# Altium PCB Ferrofluid_Display.PcbDoc
Units mil, origin at the board's own origin, x right, y up, seen from the top; angles counter-clockwise.
Board outline 4881.89 x 6043.31 mil, 2 copper layers (Top Layer, Bottom Layer); 109 components, 112 nets, 498 pads, 26 vias.
Unrouted connection lines stored in the file: 258.
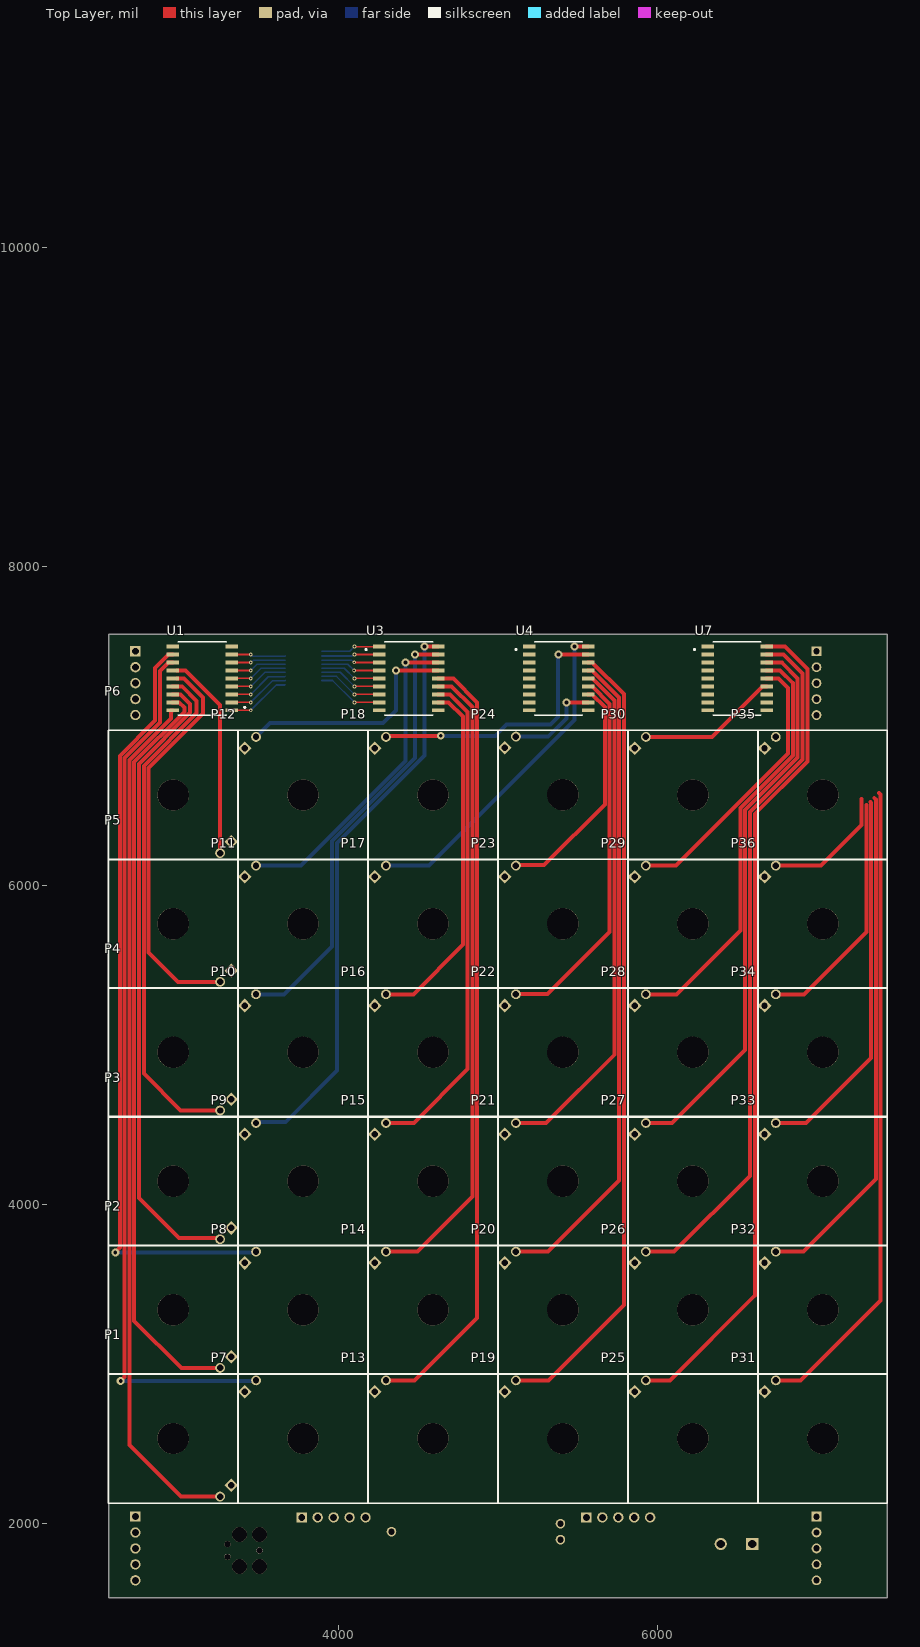
[diagram p0: Top Layer view]
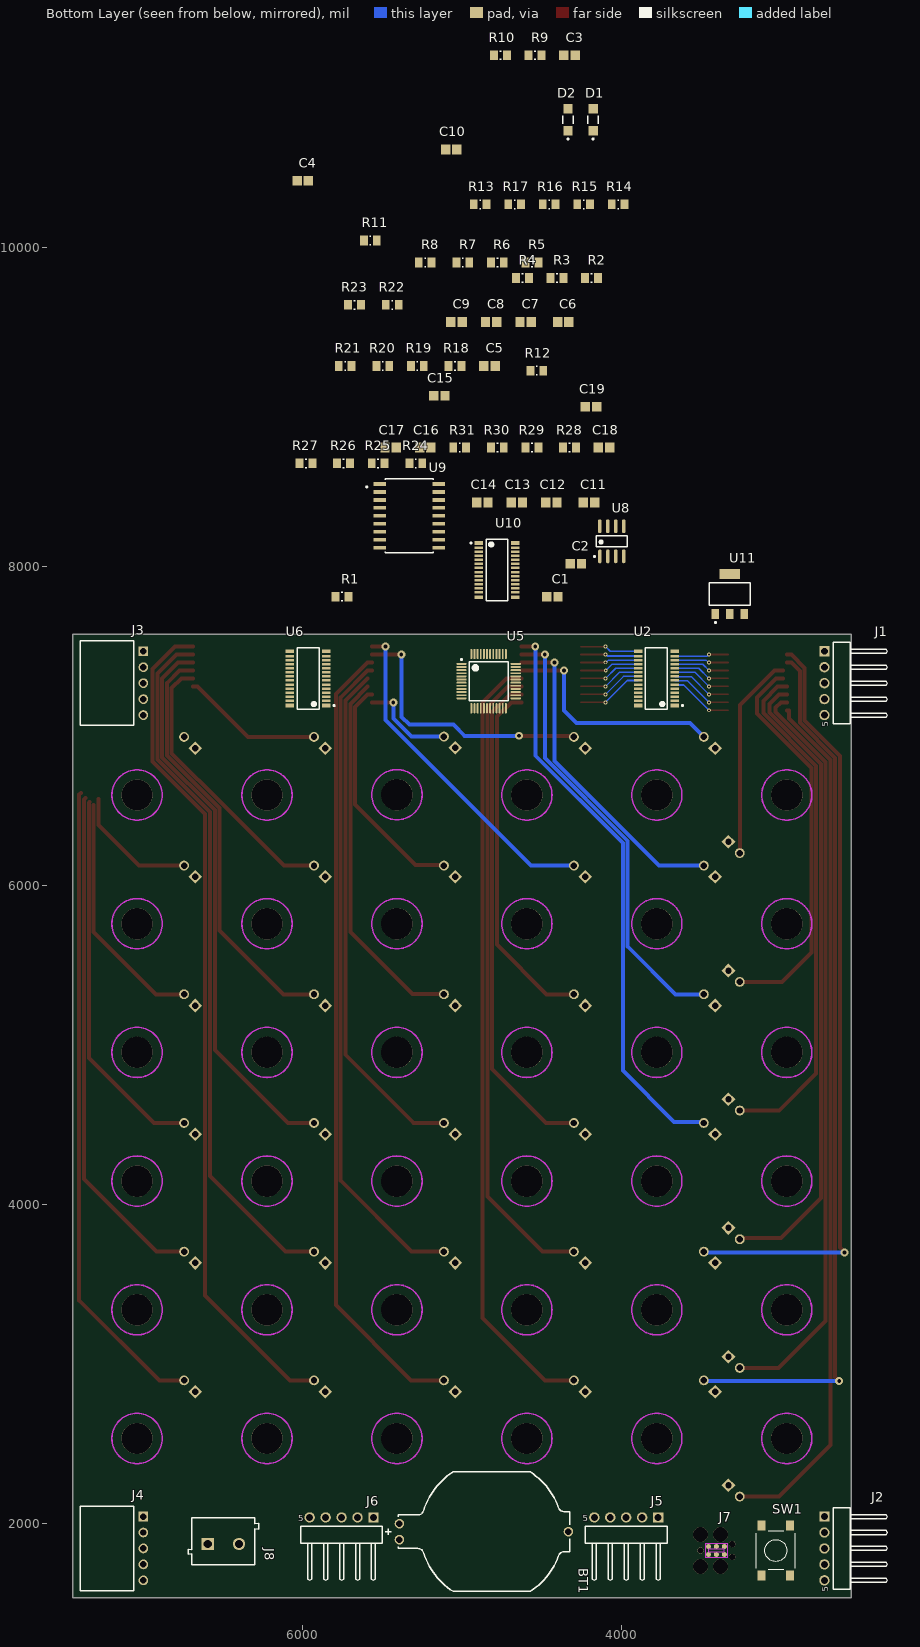
[diagram p1: Bottom Layer view, seen from below]

## Layer stack, top to bottom
Top Solder: solder mask 0.4, Solder Resist, Dk 3.5
Top Layer: signal copper 1.4
Dielectric 1: dielectric 12.6, FR-4, Dk 4.8
Bottom Layer: signal copper 1.4
Bottom Solder: solder mask 0.4, Solder Resist, Dk 3.5

## Board outline
2559.06,1535.43 2559.06,7578.74 7440.94,7578.74 7440.94,1535.43

## Design rules (kind name [scope] priority, off if disabled: settings)
BoardOutlineClearance [All] p1: gap=7.87 ignorepadtopadclearanceinfootprint=FALSE
Clearance [All] p1: gap=5 ignorepadtopadclearanceinfootprint=FALSE except(9.84: Arc-Hole Track-Hole SMDPad-Hole THPad-Hole Via-Hole Fill-Hole Poly-Hole Region-Hole Text-Hole)
ComponentClearance [All] p1: gap=5 collisioncheckmode=3 verticalgap=5 showdistances=TRUE
DiffPairsRouting [All] p1: maxlimit=10 minlimit=5 mostfreqgap=5 toplayer_minwidth=5 toplayer_maxwidth=1000 toplayer_prefwidth=5 bottomlayer_minwidth=5 bottomlayer_maxwidth=1000 bottomlayer_prefwidth=5 maxuncoupledlength=500
Height [All] p1: minheight=0 maxheight=71497.94 prefheight=500
HoleSize [All] p1: absolutevalues=TRUE maxlimit=248.03 minlimit=11.81 maxpercent=80.000 minpercent=20.000
HoleToHoleClearance [All] p1: gap=9.84 allowstackedmicrovias=FALSE
MinimumAnnularRing [All] p1: minimumring=3
MinimumSolderMaskSliver [All] p1: minsoldermaskwidth=0
PlaneClearance [All] p1: clearance=5
PlaneConnect PlaneConnectPowerPads [InPadClass('PowerPads')] p1: planeconnectstyle=Direct reliefexpansion=20 reliefentries=4 reliefconductorwidth=10 reliefairgap=10
PlaneConnect [All] p2: pad.planeconnectstyle=Relief pad.reliefexpansion=11.81 pad.reliefentries=4 pad.reliefconductorwidth=5 pad.reliefairgap=5 via.planeconnectstyle=Direct via.reliefexpansion=11.81 via.reliefentries=4 via.reliefconductorwidth=5 via.reliefairgap=5
PolygonConnect PolygonConnectPowerPads [All vs (InPadClass('PowerPads'))] p1: connectstyle=Direct reliefconductorwidth=10 reliefentries=4 polygonreliefangle="90 Angle" airgapwidth=10
PolygonConnect [All] p2: thpad.connectstyle=Relief thpad.reliefconductorwidth=20 thpad.reliefentries=4 thpad.polygonreliefangle="90 Angle" thpad.airgapwidth=5 smdpad.connectstyle=Relief smdpad.reliefconductorwidth=20 smdpad.reliefentries=4 smdpad.polygonreliefangle="90 Angle" smdpad.airgapwidth=5 via.connectstyle=Direct via.reliefconductorwidth=5 via.reliefentries=4 via.polygonreliefangle="90 Angle" via.airgapwidth=5
RoutingVias [All] p1: holewidth=11.81 width=23.62 viastyle="Through Hole" minholewidth=11.81 minwidth=23.62 maxholewidth=23.62 maxwidth=259.84
SilkToSilkClearance [All] p1: silktosilkclearance=0
SilkToSolderMaskClearance [IsPad] p1: minsilkscreentomaskgap=5 clearancetoexposedcopper=TRUE
SolderMaskExpansion [All] p1: expansion=2.95 istentingtop=FALSE
Width [All] p1: maxlimit=25 minlimit=5 preferedwidth=10
20 further rules are at their usual default settings.

## Components (designator, comment, footprint, x,y, rotation, side; value= is the part's Value field where it differs from the comment)
BT1 "120591-1" TECO-120591-1-2_V 4862.2,1948.82 r180 bottom locked
C1 "Cap_0805" CAPC2013X88X50ML20T25 4433.05,7812.75 r180 bottom value=100nF
C2 "Cap_0805" CAPC2013X88X50ML20T25 4285.43,8019.45 r0 bottom value=100nF
C3 "Cap_0805" CAPC2013X88X50ML20T25 4324.72,11208.42 r180 bottom value=100nF
C4 "Cap_0805" CAPC2013X88X50ML20T25 5997.97,10421.02 r180 bottom value=100nF
C5 "Cap_0805" CAPC2013X88X50ML20T25 4826.72,9259.6 r180 bottom value=100nF
C6 "Cap_0805" CAPC2013X88X50ML20T25 4364.13,9535.19 r180 bottom value=100nF
C7 "Cap_0805" CAPC2013X88X50ML20T25 4600.35,9535.19 r180 bottom value=100nF
C8 "Cap_0805" CAPC2013X88X50ML20T25 4816.89,9535.19 r180 bottom value=100nF
C9 "Cap_0805" CAPC2013X88X50ML20T25 5033.42,9535.19 r180 bottom value=100nF
C10 "Cap_0805" CAPC2013X88X50ML20T25 5066.93,10617.87 r180 bottom value=100nF
C11 "Cap_0805" CAPC2013X88X50ML20T25 4202.76,8403.31 r180 bottom value=4.7uF
C12 "Cap_0805" CAPC2013X88X50ML20T25 4438.98,8403.31 r180 bottom value=4.7uF
C13 "Cap_0805" CAPC2013X88X50ML20T25 4655.51,8403.31 r180 bottom value=4.7uF
C14 "Cap_0805" CAPC2013X88X50ML20T25 4872.05,8403.31 r180 bottom value=4.7uF
C15 "Cap_0805" CAPC2013X88X50ML20T25 5141.7,9072.59 r180 bottom value=100nF
C16 "Cap_0805" CAPC2013X88X50ML20T25 5230.3,8747.79 r180 bottom value=10uF
C17 "Cap_0805" CAPC2013X88X50ML20T25 5446.84,8747.79 r180 bottom value=22uF
C18 "Cap_0805" CAPC2013X88X50ML20T25 4108.26,8747.79 r180 bottom value=100nF
C19 "Cap_0805" CAPC2013X88X50ML20T25 4190.94,9003.7 r180 bottom value=100nF
D1 "LTST-C150AKT" FP-LTST-C150AKT-MFG 4177.07,10804.88 r90 bottom
D2 "LTST-C150AKT" FP-LTST-C150AKT-MFG 4334.55,10804.88 r90 bottom
J1 "61300511021" 61300511021 2617.32,7270.47 r90 bottom locked
J2 "61300511021" 61300511021 2617.32,1843.7 r90 bottom locked
J3 "SSQ-105-02-T-S-RA" SMTC-SSQ-105-02-X-S-RA 6998.03,7470.47 r270 bottom locked
J4 "SSQ-105-02-T-S-RA" SMTC-SSQ-105-02-X-S-RA 6998.03,2043.7 r270 bottom locked
J5 "61300511021" 61300511021 3969.68,1929.13 r180 bottom locked
J6 "61300511021" 61300511021 5754.72,1929.13 r180 bottom locked
J7 "SWD Interface" J-Link_6-pin_Needle_Adapter 3503.94,1830.71 r180 bottom locked
J8 "691102710002" 691102710002 6496.06,1889.76 r180 bottom locked
P1 "5-146280-2" ELECTROMAGNET 2962.6,2533.46 r90 top locked
P2 "5-146280-2" ELECTROMAGNET 2962.6,3340.55 r90 top locked
P3 "5-146280-2" ELECTROMAGNET 2962.6,4147.64 r90 top locked
P4 "5-146280-2" ELECTROMAGNET 2962.6,4954.72 r90 top locked
P5 "5-146280-2" ELECTROMAGNET 2962.6,5761.81 r90 top locked
P6 "5-146280-2" ELECTROMAGNET 2962.6,6568.9 r90 top locked
P7 "5-146280-2" ELECTROMAGNET 3777.56,2533.46 r270 top locked
P8 "5-146280-2" ELECTROMAGNET 3777.56,3340.55 r270 top locked
P9 "5-146280-2" ELECTROMAGNET 3777.56,4147.64 r270 top locked
P10 "5-146280-2" ELECTROMAGNET 3777.56,4954.72 r270 top locked
P11 "5-146280-2" ELECTROMAGNET 3777.56,5761.81 r270 top locked
P12 "5-146280-2" ELECTROMAGNET 3777.56,6568.9 r270 top locked
P13 "5-146280-2" ELECTROMAGNET 4592.52,2533.46 r270 top locked
P14 "5-146280-2" ELECTROMAGNET 4592.52,3340.55 r270 top locked
P15 "5-146280-2" ELECTROMAGNET 4592.52,4147.64 r270 top locked
P16 "5-146280-2" ELECTROMAGNET 4592.52,4954.72 r270 top locked
P17 "5-146280-2" ELECTROMAGNET 4592.52,5761.81 r270 top locked
P18 "5-146280-2" ELECTROMAGNET 4592.52,6568.9 r270 top locked
P19 "5-146280-2" ELECTROMAGNET 5407.48,2533.46 r270 top locked
P20 "5-146280-2" ELECTROMAGNET 5407.48,3340.55 r270 top locked
P21 "5-146280-2" ELECTROMAGNET 5407.48,4147.64 r270 top locked
P22 "5-146280-2" ELECTROMAGNET 5407.48,4954.72 r270 top locked
P23 "5-146280-2" ELECTROMAGNET 5407.48,5761.81 r270 top locked
P24 "5-146280-2" ELECTROMAGNET 5407.48,6570.87 r270 top locked
P25 "5-146280-2" ELECTROMAGNET 6222.44,2533.46 r270 top locked
P26 "5-146280-2" ELECTROMAGNET 6222.44,3340.55 r270 top locked
P27 "5-146280-2" ELECTROMAGNET 6222.44,4147.64 r270 top locked
P28 "5-146280-2" ELECTROMAGNET 6222.44,4954.72 r270 top locked
P29 "5-146280-2" ELECTROMAGNET 6222.44,5761.81 r270 top locked
P30 "5-146280-2" ELECTROMAGNET 6222.44,6568.9 r270 top locked
P31 "5-146280-2" ELECTROMAGNET 7037.4,2533.46 r270 top locked
P32 "5-146280-2" ELECTROMAGNET 7037.4,3340.55 r270 top locked
P33 "5-146280-2" ELECTROMAGNET 7037.4,4147.64 r270 top locked
P34 "5-146280-2" ELECTROMAGNET 7037.4,4954.72 r270 top locked
P35 "5-146280-2" ELECTROMAGNET 7037.4,6568.9 r270 top locked
P36 "5-146280-2" ELECTROMAGNET 7037.4,5761.81 r270 top locked
R1 "Res_0805" RESC2013X50X30ML20T20 5751.95,7812.75 r180 bottom value=0R
R2 "Res_0805" RESC2013X50X30ML20T20 4186.99,9810.78 r180 bottom value=0R
R3 "Res_0805" RESC2013X50X30ML20T20 4403.52,9810.78 r180 bottom value=0R
R4 "Res_0805" RESC2013X50X30ML20T20 4620.06,9810.78 r180 bottom value=0R
R5 "Res_0805" RESC2013X50X30ML20T20 4561.01,9909.21 r180 bottom value=0R
R6 "Res_0805" RESC2013X50X30ML20T20 4777.55,9909.21 r180 bottom value=0R
R7 "Res_0805" RESC2013X50X30ML20T20 4994.08,9909.21 r180 bottom value=0R
R8 "Res_0805" RESC2013X50X30ML20T20 5230.3,9909.21 r180 bottom value=0R
R9 "Res_0805" RESC2013X50X30ML20T20 4541.25,11208.42 r180 bottom value=100R
R10 "Res_0805" RESC2013X50X30ML20T20 4757.79,11208.42 r180 bottom value=100R
R11 "Res_0805" RESC2013X50X30ML20T20 5574.73,10047 r180 bottom value=4k7
R12 "Res_0805" RESC2013X50X30ML20T20 4530.51,9230.08 r180 bottom value=4k7
R13 "Res_0805" RESC2013X50X30ML20T20 4885.77,10273.38 r180 bottom value=4k7
R14 "Res_0805" RESC2013X50X30ML20T20 4019.63,10273.38 r180 bottom value=0R
R15 "Res_0805" RESC2013X50X30ML20T20 4236.16,10273.38 r180 bottom value=0R
R16 "Res_0805" RESC2013X50X30ML20T20 4452.7,10273.38 r180 bottom value=0R
R17 "Res_0805" RESC2013X50X30ML20T20 4669.23,10273.38 r180 bottom value=0R
R18 "Res_0805" RESC2013X50X30ML20T20 5043.26,9259.6 r180 bottom value=0R
R19 "Res_0805" RESC2013X50X30ML20T20 5279.48,9259.6 r180 bottom value=0R
R20 "Res_0805" RESC2013X50X30ML20T20 5496.01,9259.6 r180 bottom value=0R
R21 "Res_0805" RESC2013X50X30ML20T20 5732.23,9259.6 r180 bottom value=0R
R22 "Res_0805" RESC2013X50X30ML20T20 5436.96,9643.46 r180 bottom value=4k7
R23 "Res_0805" RESC2013X50X30ML20T20 5673.18,9643.46 r180 bottom value=4k7
R24 "Res_0805" RESC2013X50X30ML20T20 5289.35,8649.36 r180 bottom value=0R
R25 "Res_0805" RESC2013X50X30ML20T20 5525.57,8649.36 r180 bottom value=0R
R26 "Res_0805" RESC2013X50X30ML20T20 5742.1,8649.36 r180 bottom value=0R
R27 "Res_0805" RESC2013X50X30ML20T20 5978.32,8649.36 r180 bottom value=0R
R28 "Res_0805" RESC2013X50X30ML20T20 4324.79,8747.79 r180 bottom value=0R
R29 "Res_0805" RESC2013X50X30ML20T20 4561.01,8747.79 r180 bottom value=0R
R30 "Res_0805" RESC2013X50X30ML20T20 4777.55,8747.79 r180 bottom value=0R
R31 "Res_0805" RESC2013X50X30ML20T20 5013.77,8747.79 r180 bottom value=0R
SW1 "430152043836" 430152043836 3031.5,1830.71 r90 bottom locked
U1 "ULN2803ADWRG4" FP-DW0018A-MFG 3145,7300 r180 top
U2 "PCA9685PW,118" FP-SOT361-1-MFG 3780,7300 r0 bottom
U3 "ULN2803ADWRG4" FP-DW0018A-MFG 4440,7300 r0 top
U4 "ULN2803ADWRG4" FP-DW0018A-MFG 5380,7300 r0 top
U5 "STM32F030C6T6TR" STM-LQFP48_M 4832.68,7283.46 r180 bottom
U6 "PCA9685PW,118" FP-SOT361-1-MFG 5964.84,7300 r0 bottom
U7 "ULN2803ADWRG4" FP-DW0018A-MFG 6500,7300 r0 top
U8 "DS3231MZ+" S8MK+1_N 4060,8160 r90 bottom
U9 "ULN2803ADWRG4" FP-DW0018A-MFG 5330,8320 r180 bottom
U10 "PCA9685PW,118" FP-SOT361-1-MFG 4780,7980 r180 bottom
U11 "AZ1117CH-3.3TRG1" FP-SOT223-MFG 3320,7830 r90 bottom

## Footprints (in the part's own frame and the unit in brackets; to place one, negate y for a bottom-side part, rotate by r counter-clockwise, add the part's x,y. Pads: shape width x height; smd on the part's side, far side on the other; paste and mask are expansions set on the pad)
61300511021 [mm] "Pin Header, pitch 2.54 mm, THT, Angled, single row, 5p"
  rect 1.65x1.65 hole 1.1: 1(5.08,2.77)
  round 1.65 hole 1.1: 2(2.54,2.77) 3(0,2.77) 4(-2.54,2.77) 5(-5.08,2.77)
  silkscreen extent -6.5,-7.27 6.5,1.35, body extent -6.35,-7.27 6.35,3.09, height 2.58
430152043836 [mm] "6*6mm vertical type, SMD, height 4.3mm, salmon actuator, 360gf, T&R"
  rect 1.55x1.3 smd: 1(-3.975,2.25) 2(-3.975,-2.25) 3(3.975,2.25) 4(3.975,-2.25)
  silkscreen extent -3.1,-3.1 3.1,3.1, body extent -4.5,-3.1 4.5,3.1, height 4.29
691102710002 [mm] "5,00mm - modular - blue - Horizontal entry with pressure clamp - 9,9 mm height - 02p"
  rect 1.95x1.95 hole 1.3: 1(-2.5,-0.45)
  round 1.95 hole 1.3: 2(2.5,-0.45)
  silkscreen extent -5.6,-3.75 5.6,3.75, body extent -5.6,-3.75 5.6,3.75, height 9.96
CAPC2013X88X50ML20T25 [mm] "Chip Capacitor, 2-Leads, Body 2.00x1.25mm, IPC Low Density"
  rect 1.5x1.55 smd: 1(-0.9,0) 2(0.9,0)
  body extent -1.1,-0.72 1.1,0.72, height 0.88
ELECTROMAGNET [mm]
  rect 1.57x1.57 hole 1.02 rot 135 paste-1000 mask+0: 1(-7.463,-9.284)
  round 1.57 hole 1.02 paste-1000 mask+0: 2(-9.259,-7.488)
  round 5 hole 5: ""(0,0)
  Bottom Layer keep-out circle w0.254: c0,0 r4
  silkscreen extent -10.3,-10.3 10.3,10.3, body extent -11.14,-14.94 15.02,11.22, height 25
FP-DW0018A-MFG [mm]
  rect 2x0.6 smd paste-1000 mask+0: 1(-4.7,5.08) 2(-4.7,3.81) 3(-4.7,2.54) 4(-4.7,1.27) 5(-4.7,0) 6(-4.7,-1.27) 7(-4.7,-2.54) 8(-4.7,-3.81) 9(-4.7,-5.08) 10(4.7,-5.08) 11(4.7,-3.81) 12(4.7,-2.54) 13(4.7,-1.27) 14(4.7,0) 15(4.7,1.27) 16(4.7,2.54) 17(4.7,3.81) 18(4.7,5.08)
  silkscreen extent -6.9,-5.87 3.8,5.87, body extent -5.15,-5.78 5.15,5.77, height 2.65
FP-LTST-C150AKT-MFG [mm]
  rect 1.5x1.5 smd paste+0 mask+0: 1(-1.75,0) 2(1.75,0)
  silkscreen extent -3.2,-0.85 0.63,0.85, body extent -1.6,-0.8 1.6,0.8, height 1.2
FP-SOT223-MFG [mm]
  rect 1.6x1.2 smd paste+0 mask+0: 1(-3.2,2.3) 2(-3.2,0) 3(-3.2,-2.3)
  rect 1.6x3.3 smd paste+0 mask+0: 4(3.2,0)
  silkscreen extent -4.67,-3.27 1.78,3.27, body extent -3.5,-3.25 3.5,3.25, height 1.8
FP-SOT361-1-MFG [mm]
  rect 1.35x0.6 smd paste+0 mask+0: 1(-2.925,4.325) 14(-2.925,-4.325) 15(2.925,-4.325) 28(2.925,4.325)
  rect 1.35x0.4 smd paste+0 mask+0: 2(-2.925,3.575) 3(-2.925,2.925) 4(-2.925,2.275) 5(-2.925,1.625) 6(-2.925,0.975) 7(-2.925,0.325) 8(-2.925,-0.325) 9(-2.925,-0.975) 10(-2.925,-1.625) 11(-2.925,-2.275) 12(-2.925,-2.925) 13(-2.925,-3.575) 16(2.925,-3.575) 17(2.925,-2.925) 18(2.925,-2.275) 19(2.925,-1.625) 20(2.925,-0.975) 21(2.925,-0.325) 22(2.925,0.325) 23(2.925,0.975) 24(2.925,1.625) 25(2.925,2.275) 26(2.925,2.925) 27(2.925,3.575)
  silkscreen extent -4.27,-4.9 1.75,4.9, body extent -3.2,-4.85 3.2,4.85, height 1.1
J-Link_6-pin_Needle_Adapter [mil]
  round 31 smd: 1(50,-25) 2(50,25) 3(100,-25) 4(100,25) 5(150,-25) 6(150,25)
  round 93.5 hole 93.5 unplated: M1(0,-100) M2(125,-100) M3(125,100) M4(0,100)
  round 39 hole 39 unplated: M5(0,0) M6(200,-40) M7(200,40)
  Top Layer keep-out region: 50,-8 150,-8 150,8 50,8 50,-8
  Top Layer keep-out region: 30,42 30,-42 170,-42 170,42 30,42
RESC2013X50X30ML20T20 [mm] "Chip Resistor, 2-Leads, Body 2.00x1.25mm, IPC Low Density"
  rect 1.25x1.55 smd: 1(-1.025,0) 2(1.025,0)
  silkscreen extent -0.1,-0.67 0.1,0.67, body extent -1.1,-0.72 1.1,0.72, height 0.5
S8MK+1_N [mm] "SOIC, 8-Leads, Body 4.9x3.9mm, Pitch 1.27mm, IPC Medium Density"
  oval 2.2x0.6 smd: 1(-2.4,1.905) 2(-2.4,0.635) 3(-2.4,-0.635) 4(-2.4,-1.905) 5(2.4,-1.905) 6(2.4,-0.635) 7(2.4,0.635) 8(2.4,1.905)
  silkscreen extent -2.52,-2.5 0.9,2.88, body extent -2,-2.5 2,2.5, height 1.75
SMTC-SSQ-105-02-X-S-RA [mm] "SQ Post Socket, 1x5 Pins, Right Angle, 2.54mm Pitch, Female"
  rect 1.55x1.55 hole 1.02: 1(0,0)
  round 1.55 hole 1.02: 2(2.54,0) 3(5.08,0) 4(7.62,0) 5(10.16,0)
  silkscreen extent -1.65,-10.03 11.81,-1.52, body extent -1.52,-10.03 11.68,0.32, height 2.41
STM-LQFP48_M [mm] "QFP, 48-Leads, Body 7x7mm, Pitch 0.5mm, IPC Low Density"
  oval 1.65x0.3 smd: 1(-4.325,2.75) 2(-4.325,2.25) 3(-4.325,1.75) 4(-4.325,1.25) 5(-4.325,0.75) 6(-4.325,0.25) 7(-4.325,-0.25) 8(-4.325,-0.75) 9(-4.325,-1.25) 10(-4.325,-1.75) 11(-4.325,-2.25) 12(-4.325,-2.75) 25(4.325,-2.75) 26(4.325,-2.25) 27(4.325,-1.75) 28(4.325,-1.25) 29(4.325,-0.75) 30(4.325,-0.25) 31(4.325,0.25) 32(4.325,0.75) 33(4.325,1.25) 34(4.325,1.75) 35(4.325,2.25) 36(4.325,2.75)
  oval 0.3x1.65 smd: 13(-2.75,-4.325) 14(-2.25,-4.325) 15(-1.75,-4.325) 16(-1.25,-4.325) 17(-0.75,-4.325) 18(-0.25,-4.325) 19(0.25,-4.325) 20(0.75,-4.325) 21(1.25,-4.325) 22(1.75,-4.325) 23(2.25,-4.325) 24(2.75,-4.325) 37(2.75,4.325) 38(2.25,4.325) 39(1.75,4.325) 40(1.25,4.325) 41(0.75,4.325) 42(0.25,4.325) 43(-0.25,4.325) 44(-0.75,4.325) 45(-1.25,4.325) 46(-1.75,4.325) 47(-2.25,4.325) 48(-2.75,4.325)
  silkscreen extent -4.45,-3.1 3.1,3.57, body extent -3.5,-3.5 3.5,3.5, height 1.6
TECO-120591-1-2_V [mm] "Lithium Battery Holder"
  round 1.52 hole 1.02: 1(-13.46,-1.27) 1(-13.46,1.27) 2(13.46,0)
  silkscreen extent -15.74,-9.53 13.65,9.53, body extent -13.65,-9.53 13.66,9.52, height 6.41

## Part data
BT1: library part CMP-0438-00001-2, "Lithium Battery Holder for CR2032 3V Cell", Manufacturer="TE Connectivity", AccessRights=2147483647, Body Shape="Horizontal Cylindrical", ComponentLink1Description="Manufacturer URL", ComponentLink1URL=http://www.te.com/, ComponentLink2Description=Datasheet, ComponentLink2URL=http://www.te.com/commerce/DocumentDelivery/DDEController?Action=showdoc&DocId=Customer+Drawing%7F120591%7FH%7Fpdf%7FEnglish%7FENG_CD_120591_H.pdf%7F120591-1, ContentType="Unified Component", ContentTypeGUID=CB3C11C4-E317-11DF-B822-12313F0024A2, DatasheetVersion="Rev. H, 01/2013", Folder="Unified Components\Components\TE Connectivity\Connectors & Connector Components\Power Products\Battery Interconnection Products\", FolderGUID=A6761B51-D489-48A3-9180-F4808F45AB79, ItemGUID=B2C50140-681E-4F62-8DBB-9728605318CE, ItemHRID=CMP-0438-00001, LifeCycle=Released, LifeCycleStateGUID=61E382EE-6656-4F12-9E24-BE9327104A25, Mounting Technology="Through Hole", PackageDescription="Lithium Battery Holder", PackageReference=120591-1, Packing Type=Tray, PartNumber=120591-1, ReleaseDate="20/08/2013 02:50:22 AM", RevisionId=1
C1 C2 C3 C4 C5 C6 C7 C8 C9 C10 C11 C12 C13 C14 C15 C16 C17 C18 C19: "Ceramic Capacitor X7R", Voltage Rating=50V
D1 D2: library part CMP-22017-000004-1, "LED AMBER CLEAR SMD", Colour=Amber, Forward Current=30mA, Forward Voltage=2.1V, Manufacturer=Lite-On, Package=0, Power Dissipation=100mW, Reverse Voltage=5V, Temperature="-55°C to +85°C", Temperature Range High=+85°C, Temperature Range Low=-55°C, Automotive=No, Category=Diode, ComponentLink2Description=Datasheet, ComponentLink2URL=https://media.digikey.com/pdf/Data%20Sheets/Lite-On%20PDFs/LTST-C150AKT.pdf, Device Class L1=Optoelectronics, Device Class L2=LEDs, Device Class L3=unset, Digikey Description="LED AMBER CLEAR SMD", Height=1.2mm, Lead Free=Yes, Led Orientation="Top View", Luminous Intensity=6mcd, Manufacturer Part Number=LTST-C150AKT, Mouser Description="Standard LEDs - SMD Amber Clear 602nm", Octopart=https://octopart.com/ltst-c150akt-lite-on-549804, Peak Emmision Wavelength=610nm, RoHS=TRUE, Viewing Angle=130°, Wavelength=602nm
J1 J2 J5 J6: library part CMP-1502-01067-1, "THT Angled Pin Header WR-PHD, Pitch 2.54 mm, Single Row, 5 pins", Contact Resistance=20mOhm, Manufacturer="Wurth Elektronik", Operating Temperature=-40to105degC, Rated Current=3A, Withstanding Voltage=500VAC, Working Voltage=250VAC, Datasheet URL=https://katalog.we-online.de/em/datasheet/6130xx11021.pdf, Gender=Male, Manufacturer URL=http://www.we-online.de, Mounting Technology=THT, Orientation=Angled, Package Reference=61300511021, Packaging=Bag, Part Number=61300511021, Pin Number=5, Pitch=2.54mm, Publisher=WurthElektronik, Row Number=Single
J3 J4: library part CMP-1023-00281-1, "SQ Post Socket, Through-hole, Right Angle, -55 to 105 degC, 2.54 mm Pitch, 5-Pin, Female, RoHS", Manufacturer=Samtec, Temperature Range="-55 to 105 degC", ComponentLink1Description="Manufacturer URL", ComponentLink1URL=http://www.samtec.com, ComponentLink2Description=Datasheet, ComponentLink2URL=http://www.samtec.com/documents/webfiles/pdf/SSQ_TH.PDF, ComponentLink3Description="Package Specification", ComponentLink3URL=http://www.samtec.com/documents/webfiles/cpdf/SSQ-1XX-XX-XXX-X-XX-XXX-XX-X-MKT.pdf, DatasheetVersion=F-214, Mounting Technology=Through-hole, Orientation="Right Angle", PackageDescription="Assembly, Socket Strip .025[0.64] SQ Tail", PackageReference=SSQ-105-02-X-S-RA, PackageVersion="BD, 6/1987", PartNumber=SSQ-105-02-T-S-RA, Pitch="2.54 mm", RoHS=True
J7: library part J-Link_6-pin_Needle_Adapter, "J-Link 6-pin Needle Adapter"
J8: library part CMP-1502-03258-1, "Series 102 - 5.00 mm Horizontal Entry Modular with Pressure Clamp WR-TBL, 2 pin", Manufacturer="Wurth Elektronik", Operating Temperature=-40to105degC, Datasheet URL=http://katalog.we-online.de/em/datasheet/6911027100xx.pdf, Manufacturer URL=http://www.we-online.de, Mounting Technology=THT, Package Reference=691102710002, Packaging=Box, Part Number=691102710002, Pin Number=2, Pitch=5.00mm, Publisher=WurthElektronik
P1 P2 P3 P4 P5 P6 P7 P8 P9 P10 P11 P12 P13 P14 P15 P16 P17 P18 P19 P20 P21 P22 P23 P24 P25 P26 P27 P28 P29 P30 P31 P32 P33 P34 P35 P36: library part Magnet, "Male Header, Pitch 2.54 mm, 1 x 2 Position, Height 8.21 mm, Tail Length 3.05 mm, -65 to 105 degC, RoHS, Bulk", Case\/Package=100, Colour=Black, Current Rating=3A, Flammability Rating=UL94V-0, High Temperature Housing=Yes, Manufacturer="TE Connectivity", Max Current Rating=5A, Max Operating Temperature=105degC, Min Operating Temperature=-65degC, Package Description="Male Header, Pitch 2.54 mm, 1 x 2 Position, Height 8.21 mm, Tail Length 3.05 mm", Package Quantity=500, Approvals=CSA, Board Standoff=No(Without), Connector Type=Header, Contact Gender=Male, Contact Material=CopperAlloy, Contact Mating Length=0.23inch, Contact Plating=Matte, Contact Protection=No(Without), Contact Shape=Square, Datasheet URL=http://www.te.com/commerce/DocumentDelivery/DDEController?Action=showdoc&DocId=Customer+Drawing%7F146280%7FH1%7Fpdf%7FEnglish%7FENG_CD_146280_H1.pdf%7F5-146280-2, Datasheet Version="Rev. H1, 08/2016", Depth=2.34mm, Gasket=No(Without), High Speed Serial Data Connector=No, Housing Colour=Black, Housing Material=Polymer, Keyed=No, Length=4.67mm, Manufacturer URL=http://www.te.com/, Mating Alignment=No(Without), Mating Connector Lock=No(Without), Mating Post Length=0.23inch, Mount=ThroughHole, Mounting Technology=ThroughHole, Number of Contacts=2, Number of Positions=2, Number of Rows=1, Orientation=Straight, Package Reference=5-146280-2, Packaging=Carton, Panel Mount Retention=No(Without), PCB Mount Retention=Without, PCB Mounting Orientation=Vertical, PCB Thickness=0.063inch, Pitch=2.54mm, Radiation Hardening=No, RoHSCompliant=true, Row Spacing=2.54mm, Selectively Loaded=No(Without), Stabilizers=No(Without), Termination=ThroughHole, Termination Post Length=0.12inch
R1 R2 R3 R4 R5 R6 R7 R8 R9 R10 R11 R12 R13 R14 R15 R16 R17 R18 R19 R20 R21 R22 R23 R24 R25 R26 R27 R28 R29 R30 R31: "Resistor", Power Rating=125mW, Tolerance=1%
SW1: library part CMP-1452-00002-1, "WS-TASV SMD Tact Switch 6X6 mm", Manufacturer="Wuerth Elektronik", ComponentLink1Description="Manufacturer URL", ComponentLink1URL=http://www.we-online.com, ComponentLink2Description=Datasheet, ComponentLink2URL=http://katalog.we-online.de/em/datasheet/4301x2.pdf, NoPins=04, PackageReference=430152043836, PartNumber=430152043836
U1 U3 U4 U7 U9: library part CMP-04912-000023-1, "TRANS 8NPN DARL 50V 0.5A 18SO", Ambient Temperature Range High=+85°C, Ambient Temperature Range Low=-40°C, Manufacturer="Texas Instruments", Max Junction Temp=+150°C, Nominal Supply Current=0.93mA, Output Current=500mA, Output Voltage=50V, Package=DW0018A, Temperature="-40°C to +85°C", Automotive=No, Category=IC, ComponentLink2Description=Datasheet, ComponentLink2URL=http://www.ti.com/lit/ds/symlink/uln2803a.pdf, Device Class L1="Integrated Circuits (ICs)", Device Class L2="Power Management ICs", Device Class L3="Gate Drivers", Digikey Description="TRANS 8NPN DARL 50V 0.5A 18SO", Height=2.65mm, Ipc Land Pattern Name=SOIC127P1030X265-18, Lead Free=Yes, Manufacturer Part Number=ULN2803ADWRG4, Mouser Description="Darlington Transistors TRANSISTOR ARRAYS", Number Of Drivers=8, Number Of Outputs=8, Octopart=https://octopart.com/uln2803adwrg4-texas+instruments-2343640, RoHS=TRUE, Standoff Height=0.1mm, Temperature Range High=+85°C, Temperature Range Low=-40°C, Turn Off Delay Time=130ns, Turn On Delay Time=20ns
U2 U6 U10: library part CMP-10140-000001-1, "IC LED DRIVER RGBA 28-TSSOP", Ambient Temperature Range High=+85°C, Ambient Temperature Range Low=-40°C, Manufacturer="NXP Semiconductors", Max Power Dissipation=400mW, Max Supply Voltage=5.5V, Min Supply Voltage=2.3V, Nominal Supply Current=6mA, Output Current=25mA, Output Voltage=5V, Package=SOT361-1, Temperature="-40°C to +85°C", Automotive=No, Category=IC, Ciiva Ids=1426473, ComponentLink2Description=Datasheet, ComponentLink2URL=https://www.nxp.com/docs/en/data-sheet/PCA9685.pdf, Device Class L1="Integrated Circuits (ICs)", Device Class L2="Power Management ICs", Device Class L3="LED Drivers", Digikey Description="IC LED DRIVER RGBA 28-TSSOP", Dimming=I2C,PWM, Footprint Url=https://www.nxp.com/docs/en/package-information/SOT361-1.pdf, Height=1.1mm, Import Ts=1521846855, Lead Free=Yes, Manufacturer Part Number=PCA9685PW,118, Mouser Description="LED Display Drivers I2C Bus LED Controller 28-Pin", Number Of Outputs=16, Octopart=https://octopart.com/pca9685pw%2C118-nxp+semiconductors-11853435, Release Date=1454319143, RoHS=TRUE, Standoff Height=0.05mm, Temperature Range High=+85°C, Temperature Range Low=-40°C
U5: library part CMP-0304-00063-2, "ARM Cortex-M0 32-bit MCU, 32 KB Flash, 4 KB Internal RAM, 39 I/Os, 48-Pin LQFP, -40 to 85 degC, Tape and Reel", I/Os (High Current)=39, Manufacturer=STMicroelectronics, Operating Frequency(F) (Processor speed) (MHz)=48, Package Description="48-Pin Low Profile Quad Flat Package, Body 7 x 7 mm, Pitch 0.5 mm", Package Reference=LQFP48, Supply Voltage(Vcc) min (V)=2.4, ComponentLink1Description="Manufacturer URL", ComponentLink1URL=http://www.st.com/, ComponentLink2Description=Datasheet, ComponentLink2URL=http://www.st.com/st-web-ui/static/active/en/resource/technical/document/datasheet/DM00088500.pdf, Core="ARM Cortex-M0", DatasheetVersion="Rev. 2", FLASH Size (Prog) (kB)=32, Internal RAM Size (kB)=4, Mounting Technology="Surface Mount", Packing="Tape and Reel", PartNumber=STM32F030C6T6TR
U8: library part CMP-0254-00001-2, "+/-5ppm, MEMS based Real-Time Clock, I2C Interface, 8-Pin SO, -40 to 85 degC, Pb-Free", Code_IPC=SOIC127P600-8, Code_JEDEC=MS-012-AA, ComponentLink1Description="Manufacturer URL", ComponentLink1URL=http://www.maxim-ic.com, ComponentLink2Description=Datasheet, ComponentLink2URL=http://datasheets.maxim-ic.com/en/ds/DS3231M.pdf, ComponentLink3Description="Package Specification", ComponentLink3URL=http://pdfserv.maxim-ic.com/package_dwgs/21-0041.PDF, DatasheetVersion="Rev 3, Dec-2011", PackageDescription="8-Pin Small-Outline IC, Narrow (0.15in), 1.27 mm Pitch, SOIC (N), Pb-Free", PackageReference=S8MK+1, PackageVersion="revC, 2010"
U11: library part CMP-12756-000028-1, "IC REG LINEAR 3.3V 800MA SOT223", Case/Package=SOT-223, Dropout Voltage=1.2V, Max Input Voltage=15V, Max Operating Temperature=125°C, Max Output Current=1.35A, Min Current Limit=1A, Min Operating Temperature=-20°C, Output Current=800mA, Output Voltage=3.3V, Package Quantity=4000, Power Supply Rejection Ratio (PSRR)=70dB, Quiescent Current=6mA, Reference Voltage=1.262V, Accuracy=1%, Height=1.7mm, Lead Free="Lead Free", Length=6.7mm, Mount="Surface Mount", Number Of Outputs=1, Number of Pins=4, Number of Regulators=1, Output Type=Fixed, Packaging="Tape and Reel", Polarity=Positive, Width=3.7mm

## Via types
v1: diameter 23.62, hole 11.81, Top Layer to Bottom Layer, 16 vias
v2: diameter 50, hole 23.62, Top Layer to Bottom Layer, 10 vias

## Nets (pads, with @x,y where several pads share a name; then routed paths per layer and width w, separated by ;. In a path a pad name is that pad's centre, name@x,y a point inside that pad or via, vN(x,y) a via of type N, cw(c..) or ccw(c..) an arc to the next point about the centre after c; other vN are vias at no path point)
+3V3: C2.2 C5.2 C6.2 C7.2 C8.2 C9.2 C10.2 C11.2 C12.2 C13.2 C14.2 C17.2 C19.2 D1.2 D2.2 J1.3 J2.4 J3.2 J4.3 J5.5 J7.1 R1.2 R2.2 R3.2 R4.2 R11.2 R12.2 R13.2 R14.2 R15.2 R16.2 R17.2 R22.2 R23.2 R24.2 R25.2 R26.2 R27.2 SW1.2 SW1.4 U2.28 U5.1 U5.9 U5.24 U5.48 U6.28 U8.2 U8.4 U10.28 U11.2 U11.4
+12: C1.2 C3.2 C4.2 C15.2 C16.2 C18.2 J1.4 J1.5 J2.5 J3.1 J4.1 J4.2 J8.2 P1.1 P2.1 P3.1 P4.1 P6.1 P7.1 P8.1 P9.1 P10.1 P11.1 P12.1 P14.1 P15.1 P16.1 P17.1 P18.1 P19.1 P20.1 P22.1 P23.1 P24.1 P25.1 P26.1 P27.1 P28.1 P30.1 P31.1 P32.1 P33.1 P34.1 P35.1 P36.1 U1.10 U3.10 U4.10 U7.10 U9.10 U11.3
GND: BT1.2 C1.1 C2.1 C3.1 C4.1 C5.1 C6.1 C7.1 C8.1 C9.1 C10.1 C11.1 C12.1 C13.1 C14.1 C15.1 C16.1 C17.1 C18.1 C19.1 J1.1 J1.2 J2.1 J3.5 J4.4 J4.5 J6.1 J7.5 J8.1 R5.1 R6.1 R7.1 R8.1 R18.1 R19.1 R20.1 R21.1 R28.1 R29.1 R30.1 R31.1 U1.9 U2.5 U2.14 U2.23 U2.24 U2.25 U3.9 U4.9 U5.8 U5.23 U5.44 U5.47 U6.5 U6.14 U6.23 U6.24 U6.25 U7.9 U8.5 U9.9 U10.5 U10.14 U10.23 U10.24 U10.25 U11.1
I2C_SCL: J2.3 J3.3 R12.1 U2.26 U5.21 U6.26 U8.8 U10.26
I2C_SDA: J2.2 J3.4 R11.1 U2.27 U5.22 U6.27 U8.7 U10.27
NetBT1_1: BT1.1 U8.6
NetD1_1: D1.1 R9.2
NetD2_1: D2.1 R10.2
NetJ5_1: J5.1 U5.16
NetJ5_2: J5.2 U5.15
NetJ5_3: J5.3 U5.14
NetJ5_4: J5.4 U5.13
NetJ6_2: J6.2 U5.31
NetJ6_3: J6.3 U5.30
NetJ6_4: J6.4 U5.29
NetJ6_5: J6.5 U5.17
NetJ7_2: J7.2 U5.34
NetJ7_3: J7.3 R13.1 U5.7
NetJ7_4: J7.4 U5.37
NetP1_2: P1.2 U1.18 | length 5428.6
  Top Layer w25: U1.18 2950.69,7100 2950,7099.31 2950,7050 2688.79,6788.79 2688.79,2491.21 3011.05,2168.95 P1.2
NetP2_2: P2.2 U1.17 | length 4723.9
  Top Layer w25: U1.17 3000,7150 3033.43,7116.57 3033.43,7091.01 2718.79,6776.36 2718.79,3271.21 3013.96,2976.04 P2.2
NetP3_2: P3.2 U1.16 | length 3982.3
  Top Layer w25: U1.16 3010,7200 3070,7140 3070,7085.15 2748.79,6763.93 2748.79,4041.21 3000,3790 3250.54,3790 P3.2
NetP4_2: P4.2 U1.15 | length 3237.6
  Top Layer w25: U1.15 3020,7250 3110,7160 3110,7082.72 2778.79,6751.51 2778.79,4821.21 3009.79,4590.21 P4.2
NetP5_2: P5.2 U1.14 | length 2477.5
  Top Layer w25: U1.14@2986.83,7299.31 3030.69,7299.31 3150,7180 3150,7080 2808.79,6738.79 2808.79,5581.21 2992.7,5397.3 P5.2
NetP6_2: P6.2 U1.13 | length 1288.6
  Top Layer w25: U1.13@2986.83,7349.31 3040.69,7349.31 3257.41,7132.59 P6.2
NetP7_2: P7.2 U1.12 | length 5506.8
  Top Layer w25: v2(2633.99,2893.99) 2658.79,2918.79 2658.79,6801.21 2880,7022.43 2880,7346.22 2933.78,7400 U1.12
  Bottom Layer w25: v2(2633.99,2893.99) 3478.76,2893.99 P7.2
NetP8_2: P8.2 U1.11 | length 4799.3
  Top Layer w25: v2(2600,3700) 2600,3701.21 2628.79,3730 2628.79,6813.64 2850,7034.85 2850,7366.22 2933.78,7450 U1.11
  Bottom Layer w25: v2(2600,3700) 3477.69,3700 P8.2
NetP9_2: P9.2 U3.18 | length 3615.9
  Top Layer w25: v2(4540,7500) U3.18
  Bottom Layer w25: P9.2 3489.79,4519.19 3669.19,4519.19 3990,4840 3990,6267.57 4540,6817.57 v2(4540,7500)
NetP10_2: P10.2 U3.17 | length 2792.3
  Top Layer w25: v2(4480,7450) U3.17
  Bottom Layer w25: P10.2 3659.24,5319.24 3960,5620 3960,6280 4480,6800 v2(4480,7450)
NetP11_2: P11.2 U3.16 | length 2031.6
  Top Layer w25: v2(4420,7400) U3.16
  Bottom Layer w25: P11.2 3763.9,6126.32 4420,6782.43 v2(4420,7400)
NetP12_2: P12.2 U3.15 | length 1461.3
  Top Layer w25: v2(4360,7350) U3.15
  Bottom Layer w25: P12.2 3569.34,7020 4280,7020 4360,7100 v2(4360,7350)
NetP13_2: P13.2 U3.14 | length 4901.8
  Top Layer w25: P13.2 4477.98,2897.98 4870,3290 4870,7150 4720,7300 U3.14
NetP14_2: P14.2 U3.13 | length 4024
  Top Layer w25: P14.2 4495.06,3705.06 4840,4050 4840,7120 4710,7250 U3.13
NetP15_2: P15.2 U3.12 | length 3122.8
  Top Layer w25: P15.2 4472.15,4512.15 4810,4850 4810,7090 4700,7200 U3.12
NetP16_2: P16.2 U3.11 | length 2233.3
  Top Layer w25: P16.2 4469.24,5319.24 4780,5630 4780,7060 4690,7150 U3.11
NetP17_2: P17.2 U4.18 | length 2105.8
  Top Layer w25: v2(5480,7500) U4.18
  Bottom Layer w25: P17.2 4566.32,6126.32 5480,7040 v2(5480,7500)
NetP18_2: P18.2 U4.17 | length 1709.8
  Top Layer w25: P18.2 4304.3,6940 4640,6940 4640.6,6940.6 v2(4641.31,6940.6) ; v2(5380,7450) U4.17
  Bottom Layer w25: v2(4641.31,6940.6) 4984.34,6940.6 5053.74,7010 5330,7010 5377.5,7057.5 5377.5,7447.5 v2(5380,7450)
NetP19_2: P19.2 U4.16 | length 5011.4
  Top Layer w25: P19.2 5317.98,2897.98 5790,3370 5790,7201.22 5591.22,7400 U4.16
NetP20_2: P20.2 U4.15 | length 4127.7
  Top Layer w25: P20.2 5315.06,3705.06 5760,4150 5760,7181.22 5591.22,7350 U4.15
NetP21_2: P21.2 U4.14 | length 3211.1
  Top Layer w25: P21.2 5302.15,4512.15 5730,4940 5730,7161.22 U4.14@5591.91,7299.31
NetP22_2: P22.2 U4.13 | length 2333.3
  Top Layer w25: P22.2 5113.43,5320 5310,5320 5700,5710 5700,7141.22 U4.13@5591.91,7249.31
NetP23_2: P23.2 U4.12 | length 1465.1
  Top Layer w25: P23.2 5116.35,6130 5290,6130 5670,6510 5670,7121.22 5591.22,7200 U4.12
NetP24_2: P24.2 U4.11 | length 599.8
  Top Layer w25: v2(5430,7150) U4.11
  Bottom Layer w25: P24.2 5315.38,6935.38 5430,7050 v2(5430,7150)
NetP25_2: P25.2 U7.18 | length 5282.4
  Top Layer w25: P25.2 6077.98,2897.98 6610.67,3430.67 6610.67,6450.67 6940,6780 6940,7360 6800,7500 U7.18
NetP26_2: P26.2 U7.17 | length 4410.5
  Top Layer w25: P26.2 6105.06,3705.06 6580,4180 6580,6462.43 6910,6792.43 6910,7330 6790,7450 U7.17
NetP27_2: P27.2 U7.16 | length 3515.1
  Top Layer w25: P27.2 6092.15,4512.15 6550,4970 6550,6474.85 6880,6804.85 6880,7300 6780,7400 U7.16
NetP28_2: P28.2 U7.15 | length 2643.2
  Top Layer w25: P28.2 6119.24,5319.24 6520,5720 6520,6487.28 6850,6817.28 6850,7270 6770,7350 U7.15
NetP29_2: P29.2 U7.14 | length 1753.8
  Top Layer w25: P29.2 6116.62,6126.32 6490.29,6500 6820,6829.71 6820,7240 6760,7300 U7.14
NetP30_2: P30.2 U7.13 | length 888.5
  Top Layer w25: P30.2 6342.27,6933.41 6658.86,7250 U7.13
NetP31_2: P31.2 U7.12 | length 4051.9
  Top Layer w25: P31.2 6897.98,2897.98 7400,3400 7400,6572.43 7390,6582.43
NetP32_2: P32.2 U7.11 | length 3210
  Top Layer w25: P32.2 6915.06,3705.06 7370,4160 7370,6540 7360,6550
NetP33_2: P33.2 U9.18 | length 2373.4
  Top Layer w25: P33.2 6932.15,4512.15 7340,4920 7340,6520 7335,6525
NetP34_2: P34.2 U9.17 | length 1526.8
  Top Layer w25: P34.2 6919.24,5319.24 7310,5710 7310,6507.57
NetP35_2: P35.2 U9.16
NetP36_2: P36.2 U9.15 | length 807.3
  Top Layer w25: P36.2 7026.32,6126.32 7280,6380 7280,6544.79
NetR1_1: R1.1 R5.2 U2.4
NetR2_1: R2.1 R6.2 U2.3
NetR3_1: R3.1 R7.2 U2.2
NetR4_1: R4.1 R8.2 U2.1
NetR9_1: R9.1 U5.11
NetR10_1: R10.1 U5.10
NetR14_1: R14.1 R18.2 U6.4
NetR15_1: R15.1 R19.2 U6.3
NetR16_1: R16.1 R20.2 U6.2
NetR17_1: R17.1 R21.2 U6.1
NetR22_1: R22.1 U5.32 U8.1
NetR23_1: R23.1 U5.33 U8.3
NetR24_1: R24.1 R28.2 U10.4
NetR25_1: R25.1 R29.2 U10.3
NetR26_1: R26.1 R30.2 U10.2
NetR27_1: R27.1 R31.2 U10.1
NetSW1_1: SW1.1 SW1.3 U5.12
NetU1_1: U1.1 U2.6 | length 401.7
  Top Layer w10: U1.1 v1(3450,7100)
  Bottom Layer w10: v1(3450,7100) 3608.74,7258.74 3661.97,7258.74 U2.6
NetU1_2: U1.2 U2.7 | length 391.6
  Top Layer w10: U1.2 v1(3450,7150)
  Bottom Layer w10: v1(3450,7150) 3584.33,7284.33 3661.97,7284.33 U2.7
NetU1_3: U1.3 U2.8 | length 381.5
  Top Layer w10: U1.3 v1(3450,7200)
  Bottom Layer w10: v1(3450,7200) 3559.92,7309.92 3661.97,7309.92 U2.8
NetU1_4: U1.4 U2.9 | length 371.4
  Top Layer w10: U1.4 v1(3450,7250)
  Bottom Layer w10: v1(3450,7250) 3538.39,7338.39 U2.9
NetU1_5: U1.5 U2.10 | length 361.3
  Top Layer w10: U1.5 v1(3450,7300)
  Bottom Layer w10: v1(3450,7300) 3513.98,7363.98 U2.10
NetU1_6: U1.6 U2.11 | length 351.2
  Top Layer w10: U1.6 v1(3450,7350)
  Bottom Layer w10: v1(3450,7350) 3489.57,7389.57 U2.11
NetU1_7: U1.7 U2.12 | length 341.1
  Top Layer w10: U1.7 v1(3450,7400)
  Bottom Layer w10: v1(3450,7400) 3453.69,7400 3468.84,7415.16 U2.12
NetU1_8: U1.8 U2.13 | length 339.3
  Top Layer w10: U1.8 v1(3450,7450)
  Bottom Layer w10: v1(3450,7450) 3452.67,7450 3462.67,7440 3664.09,7440 U2.13
NetU2_15: U2.15 U3.1 | length 372.1
  Top Layer w10: v1(4100,7500) U3.1
  Bottom Layer w10: U2.15 4070.28,7470.28 v1(4100,7500)
NetU2_16: U2.16 U3.2 | length 363.6
  Top Layer w10: v1(4100,7450) U3.2
  Bottom Layer w10: U2.16 4087.06,7440.75 4096.31,7450 v1(4100,7450)
NetU2_17: U2.17 U3.3 | length 366.1
  Top Layer w10: v1(4099.1,7400.9) 4100,7400 U3.3
  Bottom Layer w10: U2.17 4081.16,7415.16 4095.42,7400.9 v1(4099.1,7400.9)
NetU2_18: U2.18 U3.4 | length 376.2
  Top Layer w10: v1(4098.08,7350) U3.4
  Bottom Layer w10: U2.18 4058.51,7389.57 v1(4098.08,7350)
NetU2_19: U2.19 U3.5 | length 386.3
  Top Layer w10: v1(4100,7300) U3.5
  Bottom Layer w10: U2.19 4036.02,7363.98 v1(4100,7300)
NetU2_20: U2.20 U3.6 | length 396.4
  Top Layer w10: v1(4100,7250) U3.6
  Bottom Layer w10: U2.20 4011.61,7338.39 v1(4100,7250)
NetU2_21: U2.21 U3.7 | length 406.5
  Top Layer w10: v1(4100,7200) U3.7
  Bottom Layer w10: U2.21 3987.2,7312.8 v1(4100,7200)
NetU2_22: U2.22 U3.8 | length 416.6
  Top Layer w10: v1(4100,7150) U3.8
  Bottom Layer w10: U2.22 3962.8,7287.2 v1(4100,7150)
NetU4_1: U4.1 U6.6
NetU4_2: U4.2 U6.7
NetU4_3: U4.3 U6.8
NetU4_4: U4.4 U6.9
NetU4_5: U4.5 U6.10
NetU4_6: U4.6 U6.11
NetU4_7: U4.7 U6.12
NetU4_8: U4.8 U6.13
NetU6_15: U6.15 U7.1
NetU6_16: U6.16 U7.2
NetU6_17: U6.17 U7.3
NetU6_18: U6.18 U7.4
NetU6_19: U6.19 U7.5
NetU6_20: U6.20 U7.6
NetU6_21: U6.21 U7.7
NetU6_22: U6.22 U7.8
NetU9_1: U9.1 U10.6
NetU9_2: U9.2 U10.7
NetU9_3: U9.3 U10.8
NetU9_4: U9.4 U10.9
NetU9_5: U9.5 U10.10
NetU9_6: U9.6 U10.11
NetU9_7: U9.7 U10.12
NetU9_8: U9.8 U10.13
pads on no net: J7.6 J7.M1 J7.M2 J7.M3 J7.M4 J7.M5 J7.M6 J7.M7 P1. P2. P3. P4. P5. P5.1 P6. P7. P8. P9. P10. P11. P12. P13. P13.1 P14. P15. P16. P17. P18. P19. P20. P21. P21.1 P22. P23. P24. P25. P26. P27. P28. P29. P29.1 P30. P31. P32. P33. P34. P35. P36. U5.2 U5.3 U5.4 U5.5 U5.6 U5.18 U5.19 U5.20 U5.25 U5.26 U5.27 U5.28 U5.35 U5.36 U5.38 U5.39 U5.40 U5.41 U5.42 U5.43 U5.45 U5.46 U9.11 U9.12 U9.13 U9.14 U10.15 U10.16 U10.17 U10.18 U10.19 U10.20 U10.21 U10.22

## Silkscreen, mask and mechanical layers (free items; w line width, h text height)
Mechanical 1:
  the board outline again, w10

## Text inside footprints (layer, text, board x,y; h text height)
J1: Bottom Overlay "5" at 2703.94,6998.03 h40 r270
J2: Bottom Overlay "5" at 2703.94,1571.26 h40 r270
J5: Bottom Overlay "5" at 4242.13,2015.75 h40
J6: Bottom Overlay "5" at 6027.17,2015.75 h40